# EAGLE board LED Array (EAGLE 6.2)
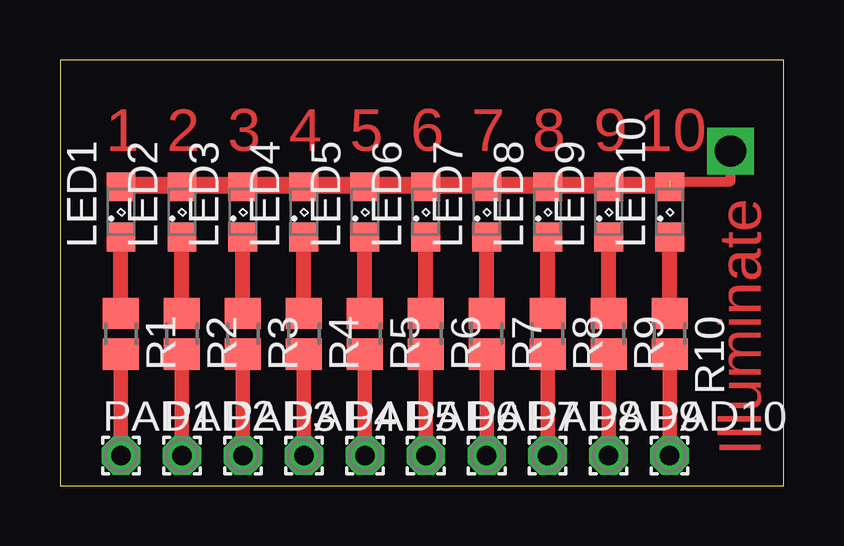
[diagram p0: board, top side]

Size 30.15 x 17.77 mm. Coordinates in mm from the lower left corner, seen from the top.
Outline: 0,0 30.15,0 30.15,17.77 0,17.77 0,0
Copper layers (1*16): Top 0.035mm / dielectric 1.5mm / Bottom 0.035mm
Design rules: minimum track width 10mil, minimum drill 24mil, track to track 8mil, track to pad 8mil, pad to pad 8mil, via to via 8mil, smd to smd 8mil, copper to edge 40mil, drill to drill 8mil, minimum pad ring 10mil, minimum via ring 8mil, stop-mask expansion 4mil, vias tented up to drill 0mil, thermal gap 10mil
Net classes: 0 default: width 0.635 mm

## Footprints (pad centres in the part's own frame; a part is rotated, then mirrored left to right if it is on the bottom)
SML0805 = smd 1.2 x 1.2: A 1.05,0; C -1.05,0
1,6/0,8 = drill 0.813 pad 1.6 octagon: 1 0,0
R0805 = smd 1.3 x 1.5: 1 -0.85,0; 2 0.85,0

## Placement (x,y rotation side)
LED1  [SML0805]  2.54,11.43 90 top
LED2  [SML0805]  5.08,11.43 90 top
LED3  [SML0805]  7.62,11.43 90 top
LED4  [SML0805]  10.16,11.43 90 top
LED5  [SML0805]  12.7,11.43 90 top
LED6  [SML0805]  15.24,11.43 90 top
LED7  [SML0805]  17.78,11.43 90 top
LED8  [SML0805]  20.32,11.43 90 top
LED9  [SML0805]  22.86,11.43 90 top
LED10  [SML0805]  25.4,11.43 90 top
PAD1  [1,6/0,8]  2.54,1.27 0 top
PAD2  [1,6/0,8]  5.08,1.27 0 top
PAD3  [1,6/0,8]  7.62,1.27 0 top
PAD4  [1,6/0,8]  10.16,1.27 0 top
PAD5  [1,6/0,8]  12.7,1.27 0 top
PAD6  [1,6/0,8]  15.24,1.27 0 top
PAD7  [1,6/0,8]  17.78,1.27 0 top
PAD8  [1,6/0,8]  20.32,1.27 0 top
PAD9  [1,6/0,8]  22.86,1.27 0 top
PAD10  [1,6/0,8]  25.4,1.27 0 top
R1  [R0805]  2.54,6.35 270 top
R2  [R0805]  5.08,6.35 270 top
R3  [R0805]  7.62,6.35 270 top
R4  [R0805]  10.16,6.35 270 top
R5  [R0805]  12.7,6.35 270 top
R6  [R0805]  15.24,6.35 270 top
R7  [R0805]  17.78,6.35 270 top
R8  [R0805]  20.32,6.35 270 top
R9  [R0805]  22.86,6.35 270 top
R10  [R0805]  25.4,6.35 270 top

## Library data of the parts
LED1-LED10 = led
PAD1-PAD10 = wirepad
R1-R10 = resistor

## Nets
GND: LED1.A LED2.A LED3.A LED4.A LED5.A LED6.A LED7.A LED8.A LED9.A LED10.A
N$1: LED1.C R1.1
N$2: PAD1.1 R1.2
N$3: PAD2.1 R2.2
N$4: LED2.C R2.1
N$5: PAD3.1 R3.2
N$6: LED3.C R3.1
N$7: PAD4.1 R4.2
N$8: LED4.C R4.1
N$9: LED5.C R5.1
N$10: PAD5.1 R5.2
N$11: PAD6.1 R6.2
N$12: LED6.C R6.1
N$13: LED7.C R7.1
N$14: PAD7.1 R7.2
N$15: PAD8.1 R8.2
N$16: LED8.C R8.1
N$17: LED9.C R9.1
N$18: PAD9.1 R9.2
N$19: PAD10.1 R10.2
N$20: LED10.C R10.1

## Tracks (layer width: path | path; a pad name or v marks a point on that pad's centre or on a via)
GND  (1 unrouted)
  Top 0.61: LED1.A LED2.A LED3.A LED4.A LED5.A LED6.A LED7.A LED8.A LED9.A LED10.A 25.4,12.7
N$1
  Top 0.635: R1.1 LED1.C
N$2
  Top 0.61: R1.2 PAD1.1
N$3
  Top 0.61: PAD2.1 R2.2
N$4
  Top 0.635: R2.1 LED2.C
N$5
  Top 0.61: PAD3.1 R3.2
N$6
  Top 0.635: R3.1 LED3.C
N$7
  Top 0.61: PAD4.1 R4.2
N$8
  Top 0.635: R4.1 LED4.C
N$9
  Top 0.635: R5.1 LED5.C
N$10
  Top 0.61: PAD5.1 R5.2
N$11
  Top 0.61: PAD6.1 R6.2
N$12
  Top 0.635: R6.1 LED6.C
N$13
  Top 0.635: R7.1 LED7.C
N$14
  Top 0.61: PAD7.1 R7.2
N$15
  Top 0.61: PAD8.1 R8.2
N$16
  Top 0.635: R8.1 LED8.C
N$17
  Top 0.635: R9.1 LED9.C
N$18
  Top 0.61: PAD9.1 R9.2
N$19
  Top 0.61: PAD10.1 R10.2
N$20
  Top 0.635: R10.1 LED10.C
N$21  (via drill 1.3)
  Top 0.406: 2.54,12.7 27.94,12.7 v27.94,13.97

## Text on the board
Top: 1 | 2 | 3 | 4 | 5 | 6 | 7 | 8 | 9 | 10 | Illuminate